# EAGLE board Arduino Shield V4 - Small - 7805 - REG - 25-11-2023 (EAGLE 9.6.2)
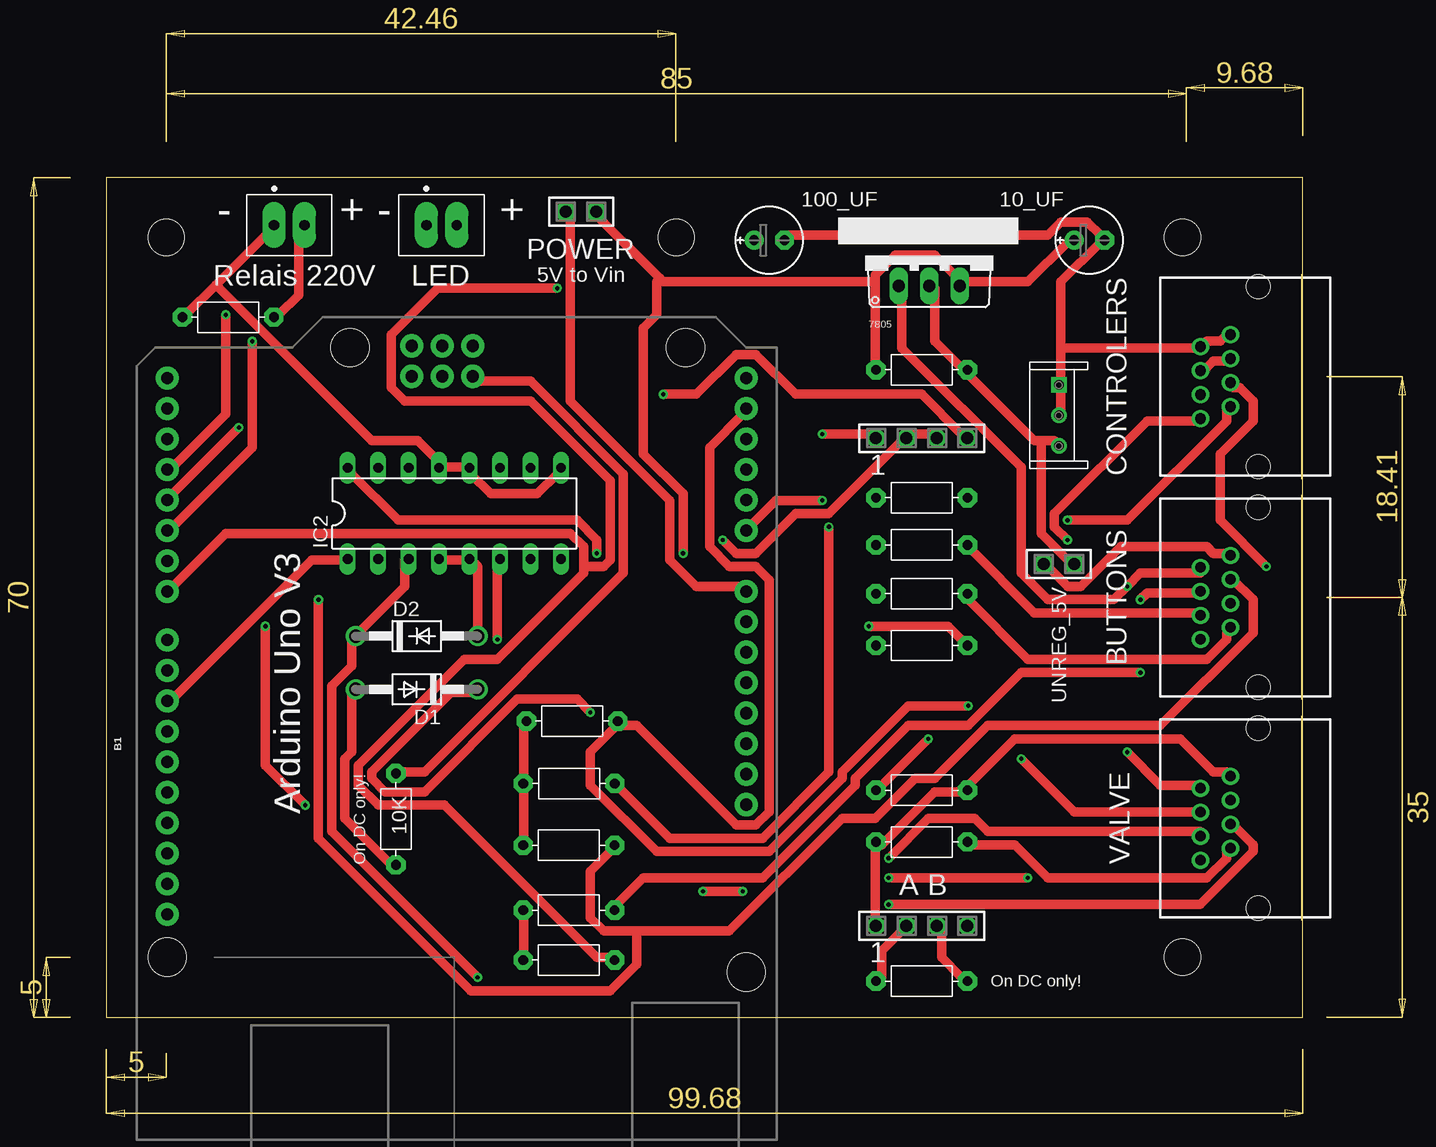
[diagram p0: board, top side]
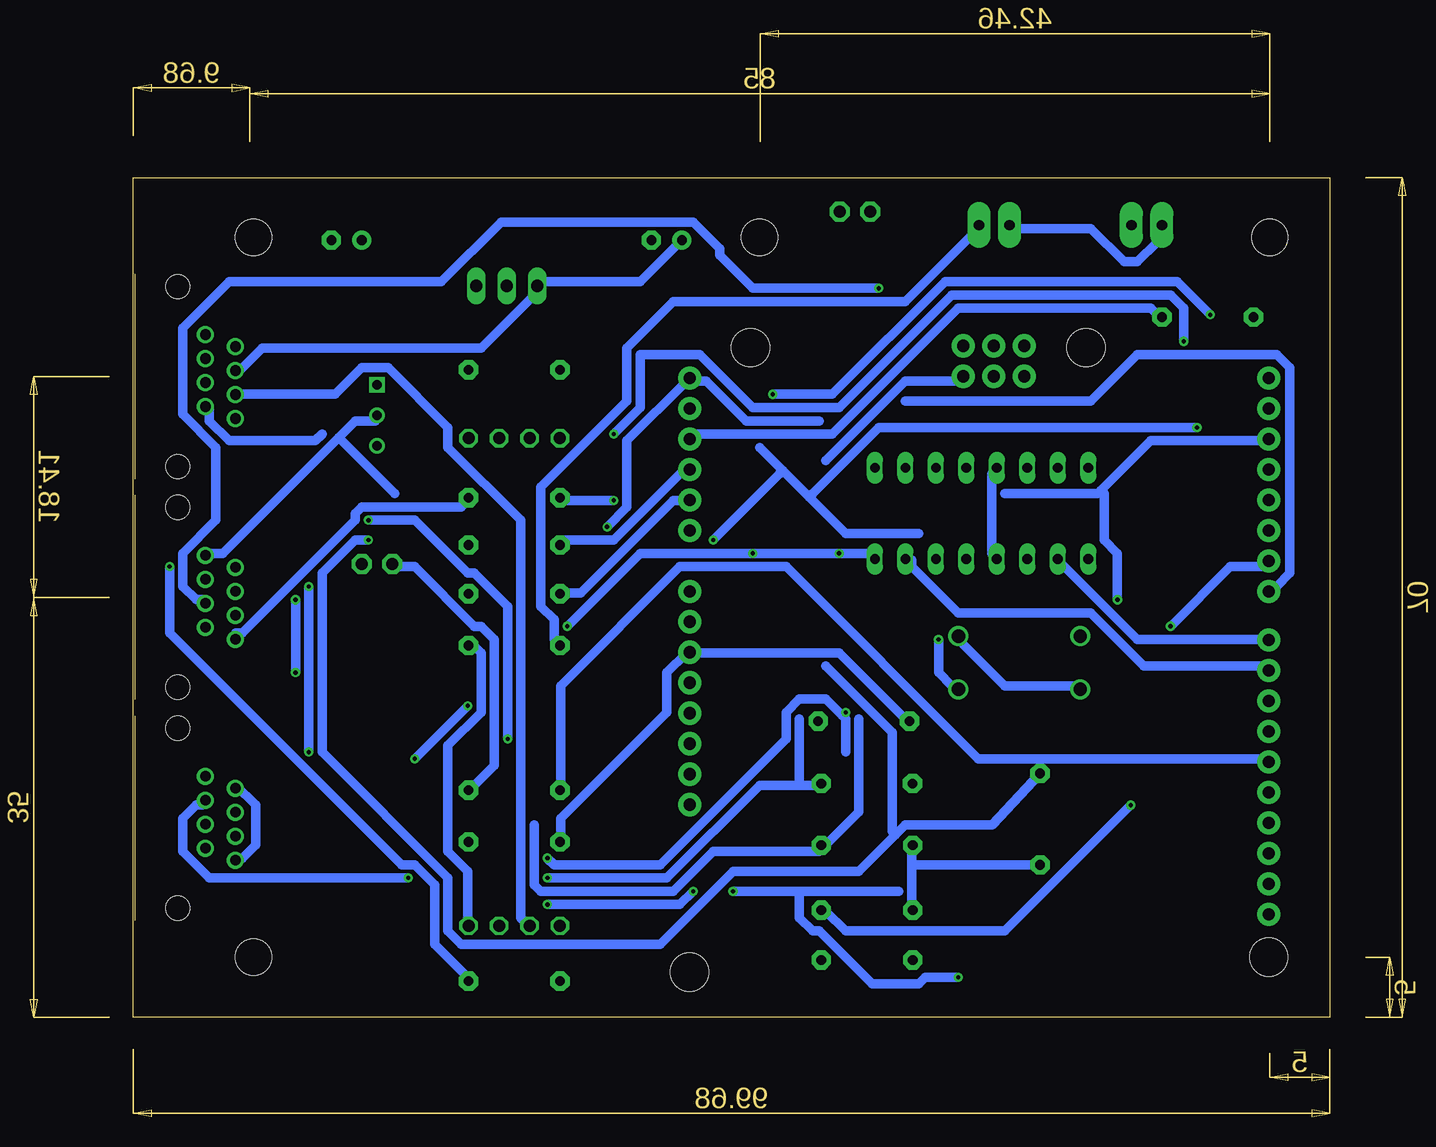
[diagram p1: board, bottom side, seen from below]

Size 99.68 x 70 mm. Coordinates in mm from the lower left corner, seen from the top.
Outline: 0,0 99.68,0 99.68,70 0,70 0,0
Copper layers (1*16): Top 0.035mm / dielectric 1.5mm / Bottom 0.035mm
Design rules "default *": minimum track width 0.8mm, minimum drill 0.35mm, track to track 12mil, track to pad 12mil, pad to pad 12mil, via to via 12mil, smd to smd 6mil, copper to edge 50mil, drill to drill 12mil, minimum pad ring 10mil, minimum via ring 8mil, stop-mask expansion 4mil, vias tented up to drill 0mil, thermal gap 10mil
Holes 3 mm at 89.68,5 89.68,65 5,65 47.5,65

## Footprints (pad centres in the part's own frame; a part is rotated, then mirrored left to right if it is on the bottom)
R-7,5 = drill 0.813 pad 1.6 octagon: 1 -3.81,0; 2 3.81,0
E2,5-6E = drill 0.813 pad 1.575: + -1.27,0 | drill 0.813 pad 1.575 octagon: - 1.27,0
ARDUINO_R3 = drill 1.016 pad 1.93: 3.3V 2.54,-24.13; 5V 5.08,-24.13; A0 17.78,-24.13; A1 20.32,-24.13; A2 22.86,-24.13; A3 25.4,-24.13; A4 27.94,-24.13; A5 30.48,-24.13; AREF -9.144,24.13; D0 30.48,24.13; D1 27.94,24.13; D2 25.4,24.13; D3 22.86,24.13; D4 20.32,24.13; D5 17.78,24.13; D6 15.24,24.13; D7 12.7,24.13; D8 8.636,24.13; D9 6.096,24.13; D10 3.556,24.13; D11 1.016,24.13; D12 -1.524,24.13; D13 -4.064,24.13; GND@1 7.62,-24.13; GND@2 10.16,-24.13; GND@3 -6.604,24.13; GND@4 33.16,-1.32; IOREF -2.54,-24.13; MISO 30.62,3.76; MOSI 33.16,1.22; NC -5.08,-24.13; RESET@1 0,-24.13; RESET@2 30.62,-1.32; SCK 30.62,1.22; SCL -14.224,24.13; SDA -11.684,24.13; VCC 33.16,3.76; VIN 12.7,-24.13 | hole 3.175: -17.78,24.13; 33.02,8.89; 33.02,-19.05; -19.05,-24.13
GLX-S-88M = drill 0.9 pad 1.422: 1 -3.5,-2; 2 -2.5,-4.5; 3 -1.5,-2; 4 -0.5,-4.5; 5 0.5,-2; 6 1.5,-4.5; 7 2.5,-2; 8 3.5,-4.5 | hole 2: -7.5,0.3; 7.5,0.3
DO41-10 = drill 1.118: A 5.08,0; C -5.08,0
DIL16 = drill 0.813 long: 1 -8.89,-3.81; 2 -6.35,-3.81; 3 -3.81,-3.81; 4 -1.27,-3.81; 5 1.27,-3.81; 6 3.81,-3.81; 7 6.35,-3.81; 8 8.89,-3.81; 9 8.89,3.81; 10 6.35,3.81; 11 3.81,3.81; 12 1.27,3.81; 13 -1.27,3.81; 14 -3.81,3.81; 15 -6.35,3.81; 16 -8.89,3.81
SSW-102-02-G-S = drill 1 pad 1.676 octagon: 1 -1.27,0; 2 1.27,0
TO220AV = drill 1.016 long: GND 0,-2.54; VI -2.54,-2.54; VO 2.54,-2.54
HDRV2W64P254_1X2_712X508X838B = drill 0.85 pad 1.93 long: 1 0,0; 2 2.54,0
W = drill 0.8 square: 1 0,-2.54 | drill 0.8: 2 0,0; 3 0,2.54
SSW-104-02-G-S = drill 1 pad 1.5 octagon: 1 -3.81,0; 2 -1.27,0; 3 1.27,0; 4 3.81,0

## Placement (x,y rotation side)
1K  470  [R-7,5]  67.94,30.99 0 top
1K1  10k  [R-7,5]  67.94,18.92 0 top
1K2  10k  [R-7,5]  10.15,58.36 180 top
1K3  120  [R-7,5]  67.94,3 180 top
1K4  470  [R-7,5]  67.94,53.98 180 top
10_UF  [E2,5-6E]  81.92,64.77 0 top
10K  10K  [R-7,5]  24.13,16.51 90 top
100_UF  [E2,5-6E]  55.24,64.77 0 top
B1  ARDUINO_UNO_R3  [ARDUINO_R3]  29.2,22.8 90 top
BUTTONS  GLX-S-88MRJ45  [GLX-S-88M]  95.68,35 270 top
CONTROLERS  GLX-S-88MRJ45  [GLX-S-88M]  95.68,53.41 270 top
D1  1N4004  [DO41-10]  25.86,27.33 180 top
D2  1N4004  [DO41-10]  25.86,31.77 0 top
IC2  L293E  [DIL16]  29,42 0 top
POWER  SSW-102-02-G-S  [SSW-102-02-G-S]  39.56,67.15 0 top
TR1  470  [R-7,5]  67.94,14.61 0 top
TR2  470  [R-7,5]  67.94,43.31 0 top
TR3  470  [R-7,5]  67.94,35.31 0 top
TR4  470  [R-7,5]  67.94,39.37 0 top
TR5  10k  [R-7,5]  38.56,19.48 0 top
TR6  10k  [R-7,5]  38.81,24.68 0 top
TR7  10K  [R-7,5]  38.54,4.76 0 top
TR8  10K  [R-7,5]  38.54,8.92 0 top
TR9  10K  [R-7,5]  38.54,14.33 0 top
U$1  7805-TO220V  [TO220AV]  68.58,63.5 0 top
U$3  JST2  [HDRV2W64P254_1X2_712X508X838B]  13.97,66.04 0 top
U$4  JST2  [HDRV2W64P254_1X2_712X508X838B]  26.67,66.04 0 top
UNREG_5V  SSW-102-02-G-S  [SSW-102-02-G-S]  79.38,37.78 0 top
VALVE  GLX-S-88MRJ45  [GLX-S-88M]  95.68,16.59 270 top
VR1  [W]  79.38,50.16 180 top
X1  SSW-104-02-G-S  [SSW-104-02-G-S]  67.94,7.62 0 top
X3  SSW-104-02-G-S  [SSW-104-02-G-S]  67.94,48.26 0 top

## Library data of the parts
1K 1K1-1K4 10K TR1-TR9 = discrete
10_UF 100_UF = rcl; SPICEPREFIX: C
B1 = SparkFun-Boards
BUTTONS CONTROLERS VALVE = con-kyconedited; OC_FARNELL: unknown; OC_NEWARK: unknown
D1 D2 = diode
IC2 = texas; MF: Arrow Electronics; MPN: L293E; OC_FARNELL: 1467711; OC_NEWARK: 89K0732
POWER UNREG_5V = con-samtecedited; MF: Samtec Inc.; MPN: SSW-102-02-G-S; OC_FARNELL: unknown; OC_NEWARK: 11P9351
U$1 = LM7805
U$3 U$4 = con-jstedited
VR1 = Volks73-Bourns; ADJUSTMENT_TYPE: Tope Adjustment; CATEGORY: Potentiometers, Variable Resistors; DESCRIPTION: TRIMMER 10K OHM 0.5W PC PIN; DOCUMENTATION_LINK: <a href="http://www.bourns.com/data/global/pdfs/3296.pdf">Datasheet</a>; DOCUMENTATION_URL: http://www.bourns.com/data/global/pdfs/3296.pdf; FAMILY: Trimmer Potentiometers; MANUFACTURER: Bourns Inc; MOUNTING_TYPE: Through Hole; NUMBER_OF_TURNS: 25; PART_NUMBER: 3296W-1-103LF; POWER: 0.5W, 1/2W; RESISTANCE: 10k; RESISTIVE_MATERIAL: Cermet; SERIES: Trimpt 3296 - Sealed; SIZE: Rectangular - 0.375" x 0.190" Face x 0.395" H (9.53mm x 4.83mm x 10.03mm); STANDARD_PACKAGE: 50; SUPPLIER_ITEM_LINK: <a href="http://www.digikey.com/product-detail/en/3296W-1-103LF/3296W-103LF-ND/1088045">Details</a>; SUPPLIER_ITEM_NUMBER: 3296W-103LF-ND; SUPPLIER_ITEM_URL: http://www.digikey.com/product-detail/en/3296W-1-103LF/3296W-103LF-ND/1088045; SUPPLIER_LINK: <a href="http://www.digikey.com">Home Page</a>; SUPPLIER_NAME: Digi-Key; SUPPLIER_URL: http://www.digikey.com; TEMPERATURE_COEFFICIENT: 100ppm/C; TERMINATION_STYLE: PC Pin; TOLERANCE: 10%
X1 X3 = con-samtec; MF: Samtec Inc.; MPN: SSW-104-02-G-S; OC_FARNELL: unknown; OC_NEWARK: 11P9384

## Nets
N$1: 10K.2 B1.RESET@2 CONTROLERS.8
N$2: 1K1.1 B1.D12 CONTROLERS.7
N$3: 1K3.2 CONTROLERS.6 X1.2
N$4: 1K3.1 CONTROLERS.5 X1.3
N$5: B1.A4 TR6.2 VALVE.4
N$6: B1.D8 IC2.2
N$7: B1.D9 IC2.7
N$8: D1.C IC2.6 VALVE.6
N$9: D2.C IC2.3 VALVE.5
N$10: TR1.2 VALVE.7
N$11: BUTTONS.8 TR2.2
N$12: 1K.1 U$4.2
N$13: 1K2.1 B1.A3 U$3.2
N$14: 1K1.2 1K2.2 10_UF.- 10K.1 100_UF.- B1.GND@1 BUTTONS.1 CONTROLERS.1 CONTROLERS.2 D1.A D2.A IC2.4 IC2.5 IC2.9 IC2.12 IC2.13 TR1.1 TR5.1 TR6.1 TR7.1 TR8.1 TR9.1 U$3.1 U$4.1 UNREG_5V.1 VALVE.1 VR1.1 VR1.2 X1.1
N$15: B1.A1 TR3.1
N$16: BUTTONS.7 TR3.2
N$17: BUTTONS.6 TR4.2
N$18: B1.A0 TR2.1
N$19: B1.D10 IC2.1
N$20: B1.A2 TR4.1
N$21: B1.D7 BUTTONS.5 TR7.2
N$22: B1.D6 BUTTONS.4 TR8.2
N$23: B1.D2 BUTTONS.3 TR9.2
N$24: B1.D3 X3.4
N$25: B1.D4 X3.2 X3.3
N$26: B1.D5 X3.1
N$27: B1.A5 TR5.2 VALVE.3
N$28: 1K4.1 U$1.GND UNREG_5V.2 VR1.3
N$30: B1.VIN POWER.1
N$31: 1K4.2 1K.2 10_UF.+ IC2.8 IC2.16 POWER.2 U$1.VO X1.4
N$32: 100_UF.+ BUTTONS.2 CONTROLERS.3 CONTROLERS.4 U$1.VI VALVE.2 VALVE.8

## Tracks (layer width: path | path; a pad name or v marks a point on that pad's centre or on a via)
N$1  (via drill 0.35)
  Top 0.8: v80.1,39.77 78.99,40.88 78.99,41.98 86.73,49.72 91.15,49.72 CONTROLERS.8 | B1.RESET@2 30.93,53.03 35.35,53.03 43.09,45.3 43.09,37.01 26.52,20.44 24.31,20.44 10K.2
  Bottom 0.8: 36.18,15.19 35.35,16.02 28.11,16.02 10K.2 | 36.18,15.19 39.22,12.15 49.72,12.15 55.79,6.08 72.36,6.08 73.47,7.18 73.47,11.6 83.97,22.1 83.97,37.01 81.2,39.77 v80.1,39.77 | 41.98,46.4 35.35,53.03 30.93,53.03 B1.RESET@2 | 41.98,29.28 36.46,23.75 36.46,15.47 36.18,15.19
N$2  (via drill 0.35)
  Top 0.8: v80.1,41.43 85.07,41.43 93.36,49.72 93.36,50.82 CONTROLERS.7 | v68.5,23.2 64.63,19.33 1K1.1
  Bottom 0.8: 83.97,48.61 84.52,48.06 91.7,48.06 93.36,49.72 93.36,50.82 CONTROLERS.7 | v80.1,41.43 76.23,41.43 71.81,37.01 71.26,37.01 68.5,34.25 v68.5,23.2 | B1.D12 5.52,21.54 29.28,21.54 45.3,37.56 54.13,37.56 64.08,27.62 64.08,19.33 1K1.1
N$3
  Top 0.8: 1K3.2 64.63,3.31 64.63,5.52 66.29,7.18 X1.2
  Bottom 0.8: CONTROLERS.6 91.15,51.93 82.86,51.93 80.65,54.13 78.44,54.13 73.47,49.16 73.47,47.51 67.39,41.43 67.39,8.29 66.84,7.73 X1.2
N$4  (via drill 0.35)
  Top 0.8: v96.67,37.56 92.8,41.43 92.8,46.95 95.56,49.72 95.56,51.37 94.46,52.48 93.91,52.48 CONTROLERS.5 | X1.3 69.6,7.18 69.6,4.97 71.26,3.31 1K3.1
  Bottom 0.8: v96.67,37.56 96.67,32.04 77.34,12.71 76.23,12.71 74.57,11.05 74.57,6.08 71.81,3.31 1K3.1
N$5  (via drill 0.35)
  Top 0.8: v76.23,21.54 80.65,17.12 91.15,17.12 VALVE.4 | B1.A4 53.03,50.27 50.27,47.51 50.27,39.22 51.93,37.56 54.13,37.56 55.24,36.46 55.24,17.12 54.13,16.02 52.48,16.02 44.19,24.31 43.09,24.31 TR6.2 42.53,24.31 40.33,22.1 40.33,19.33 45.85,13.81 55.24,13.81 61.32,19.89 61.32,20.44 66.84,25.96 v71.81,25.96
  Bottom 0.8: v71.81,25.96 v76.23,21.54
N$6
  Bottom 0.8: IC2.2 22.65,38.12 16.02,31.49 5.52,31.49 B1.D8
N$7
  Bottom 0.8: IC2.7 34.8,38.12 34.8,37.56 30.93,33.7 19.89,33.7 15.47,29.28 5.52,29.28 B1.D9
N$8  (via drill 0.35)
  Top 0.8: v32.59,31.49 32.59,38.12 IC2.6 | v65.18,13.26 68.5,16.57 72.36,16.57 73.47,15.47 91.15,15.47 VALVE.6 | v40.33,25.41 39.22,26.52 34.25,26.52 26.52,18.78 23.2,18.78 22.1,19.89 22.1,20.44 28.73,27.07 30.93,27.07 D1.C
  Bottom 0.8: v65.18,13.26 64.63,12.71 55.79,12.71 45.3,23.2 45.3,25.41 44.19,26.52 41.98,26.52 40.6,25.13 | 40.6,25.13 40.33,24.86 40.33,22.1 | v32.59,31.49 32.59,28.73 31.49,27.62 D1.C | v40.33,25.41 40.6,25.13
N$9  (via drill 0.35)
  Top 0.8: IC2.3 24.86,38.12 24.86,35.91 20.99,32.04 D2.C 20.44,31.49 20.44,29.28 18.78,27.62 18.78,15.47 v30.93,3.31 | v65.18,9.39 91.15,9.39 95.56,13.81 95.56,14.36 93.91,16.02 VALVE.5 | v53.03,10.5 v49.72,10.5
  Bottom 0.8: v65.18,9.39 54.13,9.39 v53.03,10.5 | 35.91,10.5 43.09,10.5 44.19,10.5 | v49.72,10.5 44.19,10.5 | v30.93,3.31 33.7,3.31 34.25,2.76 38.12,2.76 42.53,7.18 43.09,7.18 44.19,8.29 44.19,10.5
N$10
  Top 0.8: VALVE.7 93.36,13.81 93.36,13.26 91.7,11.6 78.44,11.6 75.68,14.36 71.81,14.36 TR1.2
N$11
  Bottom 0.8: BUTTONS.8 91.15,32.04 90.59,32.04 81.2,41.43 81.2,41.98 80.65,42.53 72.36,42.53 71.81,43.09 TR2.2
N$12
  Bottom 0.8: 1K.1 64.63,31.49 64.63,33.14 65.74,34.25 65.74,44.19 58.55,51.37 58.55,55.79 54.69,59.66 35.35,59.66 29.28,65.74 U$4.2
N$13
  Top 0.8: U$3.2 16.02,65.74 16.02,60.21 14.36,58.55 1K2.1
  Bottom 0.8: B1.A3 53.03,48.61 41.43,48.61 30.93,59.11 14.91,59.11 14.36,58.55 1K2.1
N$14
  Top 0.8: 9.12,61.04 13.81,65.74 U$3.1 | 9.12,61.04 6.63,58.55 1K2.2 | IC2.4 28.17,38.12 29.83,38.12 IC2.5 30.38,38.12 30.93,37.56 30.93,32.04 D2.A | 28.17,45.85 29.83,45.85 IC2.12 30.38,45.3 32.04,43.64 35.91,43.64 37.56,45.3 IC2.9 | 28.17,45.85 IC2.13 28.17,45.85 | 28.17,45.85 25.96,48.06 22.1,48.06 9.39,60.76 9.12,61.04 | CONTROLERS.1 93.36,56.9 92.8,56.34 91.7,56.34 CONTROLERS.2 91.15,55.79 79.55,55.79 | VR1.2 79.55,50.27 79.55,52.48 VR1.1 79.55,53.03 79.55,55.79 | 79.55,55.79 79.55,61.32 82.86,64.63 10_UF.- 82.86,65.18 81.75,66.29 79.55,66.29 78.44,65.18 56.9,65.18 100_UF.- | VALVE.1 93.36,20.44 92.25,20.44 89.49,23.2 75.68,23.2 71.81,19.33 1K1.2 71.26,18.78 69.05,18.78 64.63,14.36 TR1.1 64.08,14.36 64.08,7.73 X1.1 | TR7.1 34.8,4.97 34.8,8.84 TR8.1 | TR6.1 34.8,24.31 34.8,19.89 TR5.1 34.8,19.33 34.8,14.36 TR9.1 | BUTTONS.1 93.36,38.67 92.25,38.67 91.7,39.22 84.52,39.22 81.2,35.91 80.1,35.91 78.44,37.56 UNREG_5V.1 | D1.A 20.44,27.07 20.44,22.1 19.89,21.54 19.89,16.57 23.75,12.71 10K.1
  Bottom 0.8: 82.58,48.34 81.2,49.72 79.55,49.72 VR1.2 | 82.58,48.34 92.25,38.67 93.36,38.67 BUTTONS.1 | UNREG_5V.1 77.89,37.56 76.23,37.56 71.26,32.59 70.71,32.59 69.6,31.49 69.6,20.99 71.26,19.33 1K1.2 | 34.8,12.71 34.8,9.39 TR8.1 | 34.8,12.71 34.8,13.81 TR9.1 | TR6.1 35.35,24.86 40.88,30.38 53.03,30.38 B1.GND@1 53.58,30.38 55.24,28.73 55.24,25.41 64.08,16.57 64.08,14.91 TR1.1 | U$4.1 26.52,65.74 19.89,65.74 17.12,62.97 16.02,62.97 14.36,64.63 14.36,65.74 U$3.1 | IC2.4 28.17,38.67 28.17,45.3 IC2.13 | 77.89,43.64 82.58,48.34 | D1.A 20.99,27.62 27.07,27.62 30.93,31.49 D2.A | 34.8,12.71 24.31,12.71 10K.1
N$15
  Bottom 0.8: TR3.1 64.08,35.35 62.42,35.35 54.69,43.09 53.58,43.09 B1.A1
N$16
  Top 0.8: BUTTONS.7 93.36,32.04 93.36,31.49 91.7,29.83 76.78,29.83 71.81,34.8 TR3.2
N$17
  Top 0.8: BUTTONS.6 91.15,33.7 77.34,33.7 71.81,39.22 TR4.2
N$18  (via drill 0.35)
  Top 0.8: v59.66,43.09 55.79,43.09 53.58,40.88 B1.A0
  Bottom 0.8: v59.66,43.09 64.08,43.09 TR2.1
N$19
  Top 0.8: IC2.1 19.89,38.12 17.12,38.12 5.52,26.52 B1.D10
N$20
  Bottom 0.8: TR4.1 64.08,39.77 59.66,39.77 53.58,45.85 B1.A2
N$21  (via drill 0.35)
  Top 0.8: 39.77,37.56 39.77,39.22 38.67,40.33 9.94,40.33 5.52,35.91 B1.D7 | 39.77,37.56 39.77,37.01 32.59,29.83 29.83,29.83 20.99,20.99 20.99,19.33 22.65,17.68 28.17,17.68 40.88,4.97 41.98,4.97 TR7.2 | 39.77,37.56 41.43,37.56 41.98,38.12 41.98,44.74 35.35,51.37 24.86,51.37 23.75,52.48 23.75,56.9 27.62,60.76 v37.56,60.76
  Bottom 0.8: v37.56,60.76 48.06,60.76 50.82,63.53 50.82,64.08 53.03,66.29 69.05,66.29 74.02,61.32 91.7,61.32 95.56,57.45 95.56,50.27 92.8,47.51 92.8,41.43 95.56,38.67 95.56,35.91 94.46,34.8 93.91,34.8 BUTTONS.5 | 35.35,51.37 19.89,51.37 16.02,55.24 4.42,55.24 3.31,54.13 3.31,37.01 4.42,35.91 4.97,35.91 B1.D7
N$22  (via drill 0.35)
  Top 0.8: v86.17,34.8 86.73,35.35 91.15,35.35 BUTTONS.4 | v86.17,28.73 76.23,28.73 71.81,24.31 66.84,24.31 62.42,19.89 62.42,19.33 54.69,11.6 44.74,11.6 42.53,9.39 TR8.2 | v13.26,32.59 13.26,20.99 v16.57,17.68
  Bottom 0.8: v13.26,32.59 8.29,37.56 5.52,37.56 B1.D6 | v86.17,28.73 v86.17,34.8 | v16.57,17.68 27.07,7.18 40.33,7.18 41.98,8.84 TR8.2
N$23  (via drill 0.35)
  Top 0.8: 44.19,7.18 41.43,7.18 40.33,8.29 40.33,12.15 41.98,13.81 TR9.2 | 44.19,7.18 51.93,7.18 61.32,16.57 64.08,16.57 67.39,19.89 69.05,19.89 73.47,24.31 87.83,24.31 95.56,32.04 95.56,34.8 93.91,36.46 BUTTONS.3 | v17.68,34.8 17.68,14.91 30.38,2.21 41.98,2.21 44.19,4.42 44.19,7.18
  Bottom 0.8: 66.29,16.02 66.29,11.05 65.74,10.5 54.69,10.5 51.37,13.81 42.53,13.81 TR9.2 41.98,14.36 39.22,17.12 39.22,24.86 | 19.06,43.92 19.33,43.64 27.07,43.64 | 19.06,43.92 14.91,48.06 5.52,48.06 B1.D2 | v17.68,34.8 17.68,38.67 18.78,39.77 18.78,43.64 19.06,43.92
N$24  (via drill 0.35)
  Top 0.8: v46.4,51.93 49.16,51.93 52.48,55.24 54.13,55.24 57.45,51.93 67.94,51.93 71.26,48.61 X3.4 | v9.94,58.55 9.94,50.27 5.52,45.85 B1.D3
  Bottom 0.8: v46.4,51.93 41.43,51.93 32.04,61.32 19.33,61.32 12.71,61.32 v9.94,58.55
N$25  (via drill 0.35)
  Top 0.8: X3.3 69.05,48.61 66.84,48.61 X3.2 66.29,48.06 60.21,41.98 57.45,41.98 54.13,38.67 52.48,38.67 v51.37,39.77 | v11.05,49.16 5.52,43.64 B1.D4
  Bottom 0.8: 34.25,40.33 40.33,40.33 43.36,43.36 | 47.51,47.51 45.57,45.57 | 45.57,45.57 43.36,43.36 | v11.05,49.16 37.56,49.16 43.09,43.64 43.36,43.36 | v51.37,39.77 45.85,45.3 45.57,45.57
N$26  (via drill 0.35)
  Top 0.8: v59.66,48.61 64.08,48.61 X3.1 | v12.15,56.34 12.15,47.51 5.52,40.88 B1.D5
  Bottom 0.8: v59.66,48.61 57.45,50.82 57.45,55.24 52.48,55.24 48.06,50.82 40.88,50.82 31.49,60.21 19.89,60.21 13.26,60.21 12.15,59.11 v12.15,56.34
N$27  (via drill 0.35)
  Top 0.8: v60.21,40.88 60.21,20.44 54.69,14.91 46.95,14.91 42.53,19.33 TR5.2 | v65.18,11.6 v76.78,11.6
  Bottom 0.8: v76.78,11.6 93.36,11.6 95.56,13.81 95.56,16.57 94.46,17.68 93.91,17.68 VALVE.3 | v65.18,11.6 55.24,11.6 47.51,19.33 44.19,19.33 | 44.19,19.33 42.53,19.33 TR5.2 | 42.53,49.72 48.61,49.72 51.93,53.03 53.03,53.03 B1.A5 53.58,53.03 58.55,48.06 58.55,42.53 v60.21,40.88 | 44.19,19.33 44.19,24.86
N$28
  Top 0.8: 77.89,48.06 77.34,48.06 71.81,53.58 1K4.1 71.26,54.13 69.05,56.34 69.05,60.76 U$1.GND | 77.89,48.06 78.99,48.06 VR1.3 | 77.89,48.06 77.89,40.33 80.1,38.12 UNREG_5V.2
N$30
  Top 0.8: POWER.1 38.67,66.84 38.67,51.37 46.95,43.09 46.95,38.12 49.16,35.91 53.03,35.91 B1.VIN
N$31  (via drill 0.35)
  Top 0.8: 71.26,61.32 76.78,61.32 80.1,64.63 10_UF.+ | 71.26,61.32 U$1.VO 71.26,61.32 | 64.08,61.32 64.08,61.87 65.74,63.53 69.05,63.53 71.26,61.32 | 64.08,61.32 64.08,54.13 1K4.2 | 46.12,61.59 46.4,61.32 64.08,61.32 | 46.12,61.59 40.88,66.84 POWER.2 | v40.88,38.67 40.88,39.77 39.22,41.43 24.31,41.43 20.44,45.3 IC2.16 | v63.53,32.59 70.16,32.59 71.26,31.49 1K.2 | v48.06,38.67 48.06,43.64 44.74,46.95 44.74,57.45 45.85,58.55 45.85,61.32 46.12,61.59
  Bottom 0.8: X1.4 71.81,7.73 71.81,12.15 73.47,13.81 73.47,22.65 70.71,25.41 70.71,30.38 71.26,30.93 1K.2 | IC2.8 38.12,38.67 v40.88,38.67 v48.06,38.67 57.45,38.67 v63.53,32.59
N$32  (via drill 0.35)
  Top 0.8: CONTROLERS.3 93.36,54.69 92.25,54.69 91.7,54.13 CONTROLERS.4 | BUTTONS.2 91.15,37.01 86.17,37.01 v85.07,35.91 83.97,34.8 78.44,34.8 76.23,37.01 76.23,45.85 66.29,55.79 66.29,60.76 U$1.VI | v85.07,22.1 87.83,19.33 91.15,19.33 VALVE.2
  Bottom 0.8: 100_UF.+ 54.13,64.63 57.45,61.32 65.74,61.32 U$1.VI 66.29,60.76 66.29,60.21 70.71,55.79 88.94,55.79 91.15,53.58 CONTROLERS.4 | VALVE.8 91.15,13.26 90.59,13.26 89.49,14.36 89.49,17.68 91.15,19.33 VALVE.2 | v85.07,35.91 v85.07,22.1

## Text on the board
tNames: - + | - + | Relais 220V | LED | 5V to Vin | Arduino Uno V3 | On DC only! | A B | On DC only!
tValues: Dustcontroler V4.0 (25-11-23)